# EAGLE board DB (EAGLE 9.6.1)
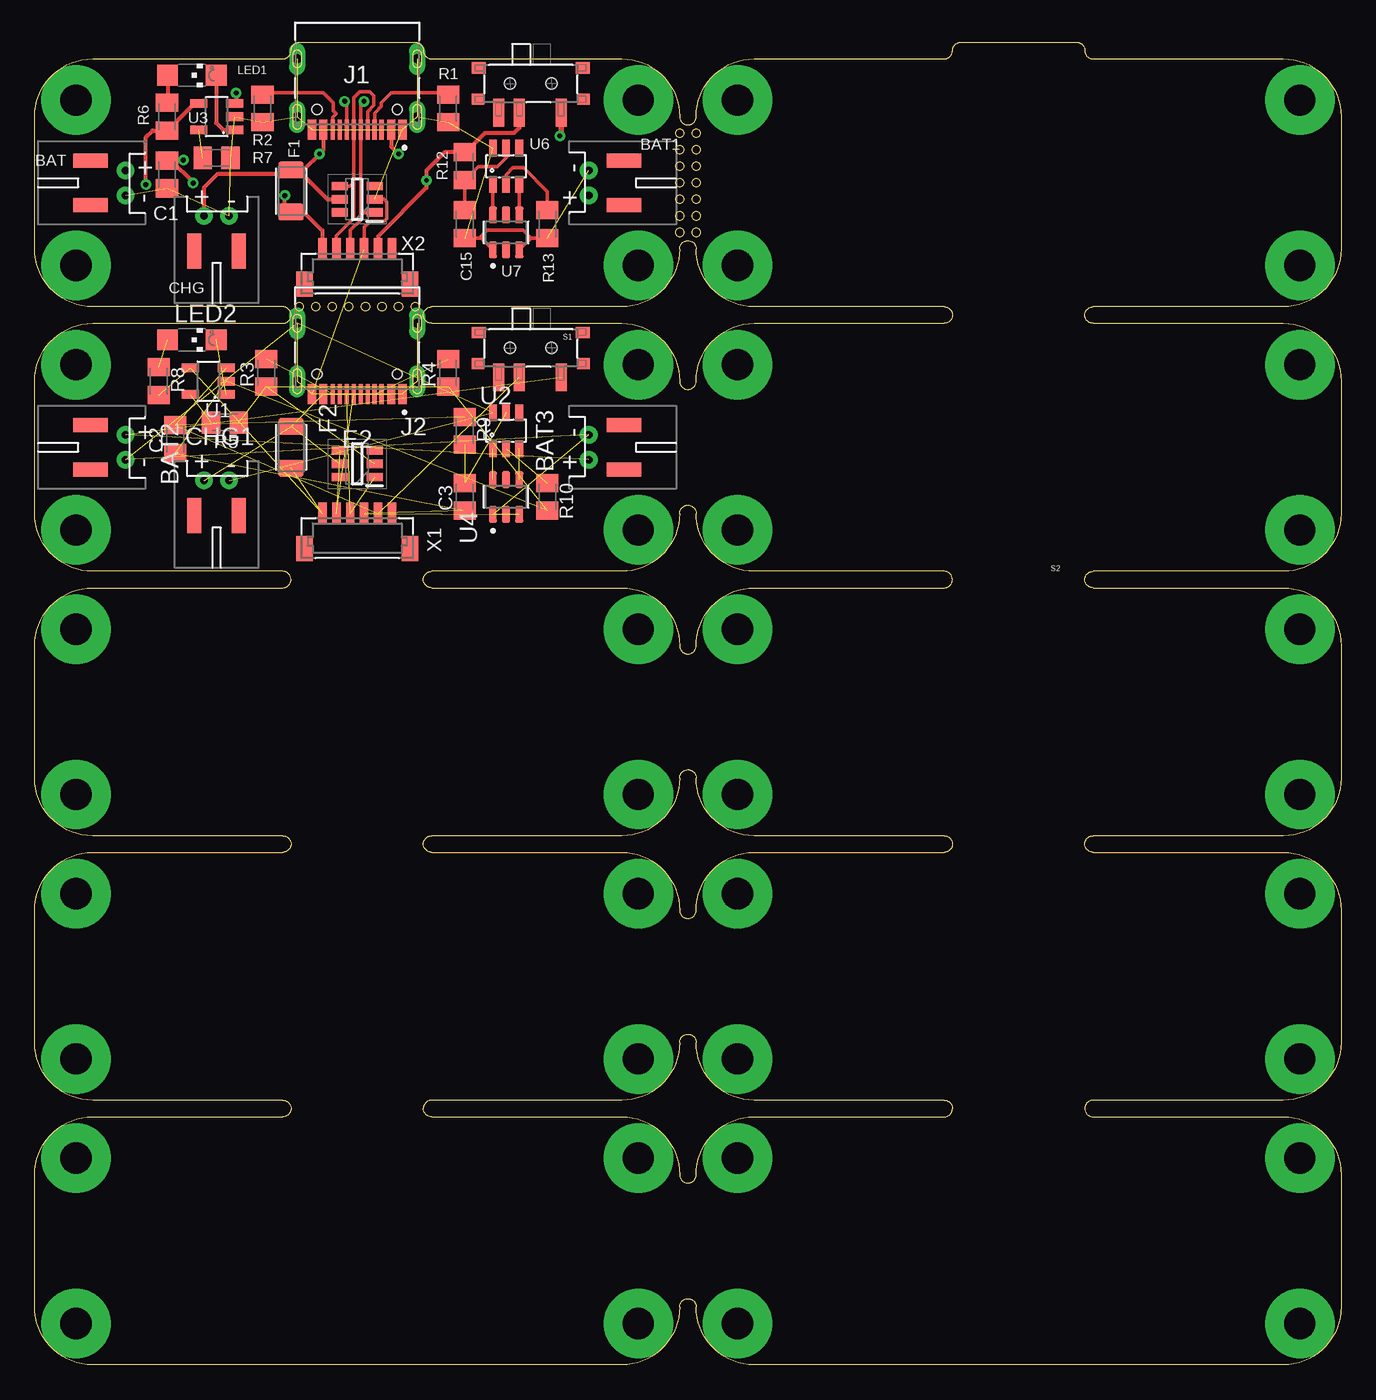
[diagram p0: board, top side]
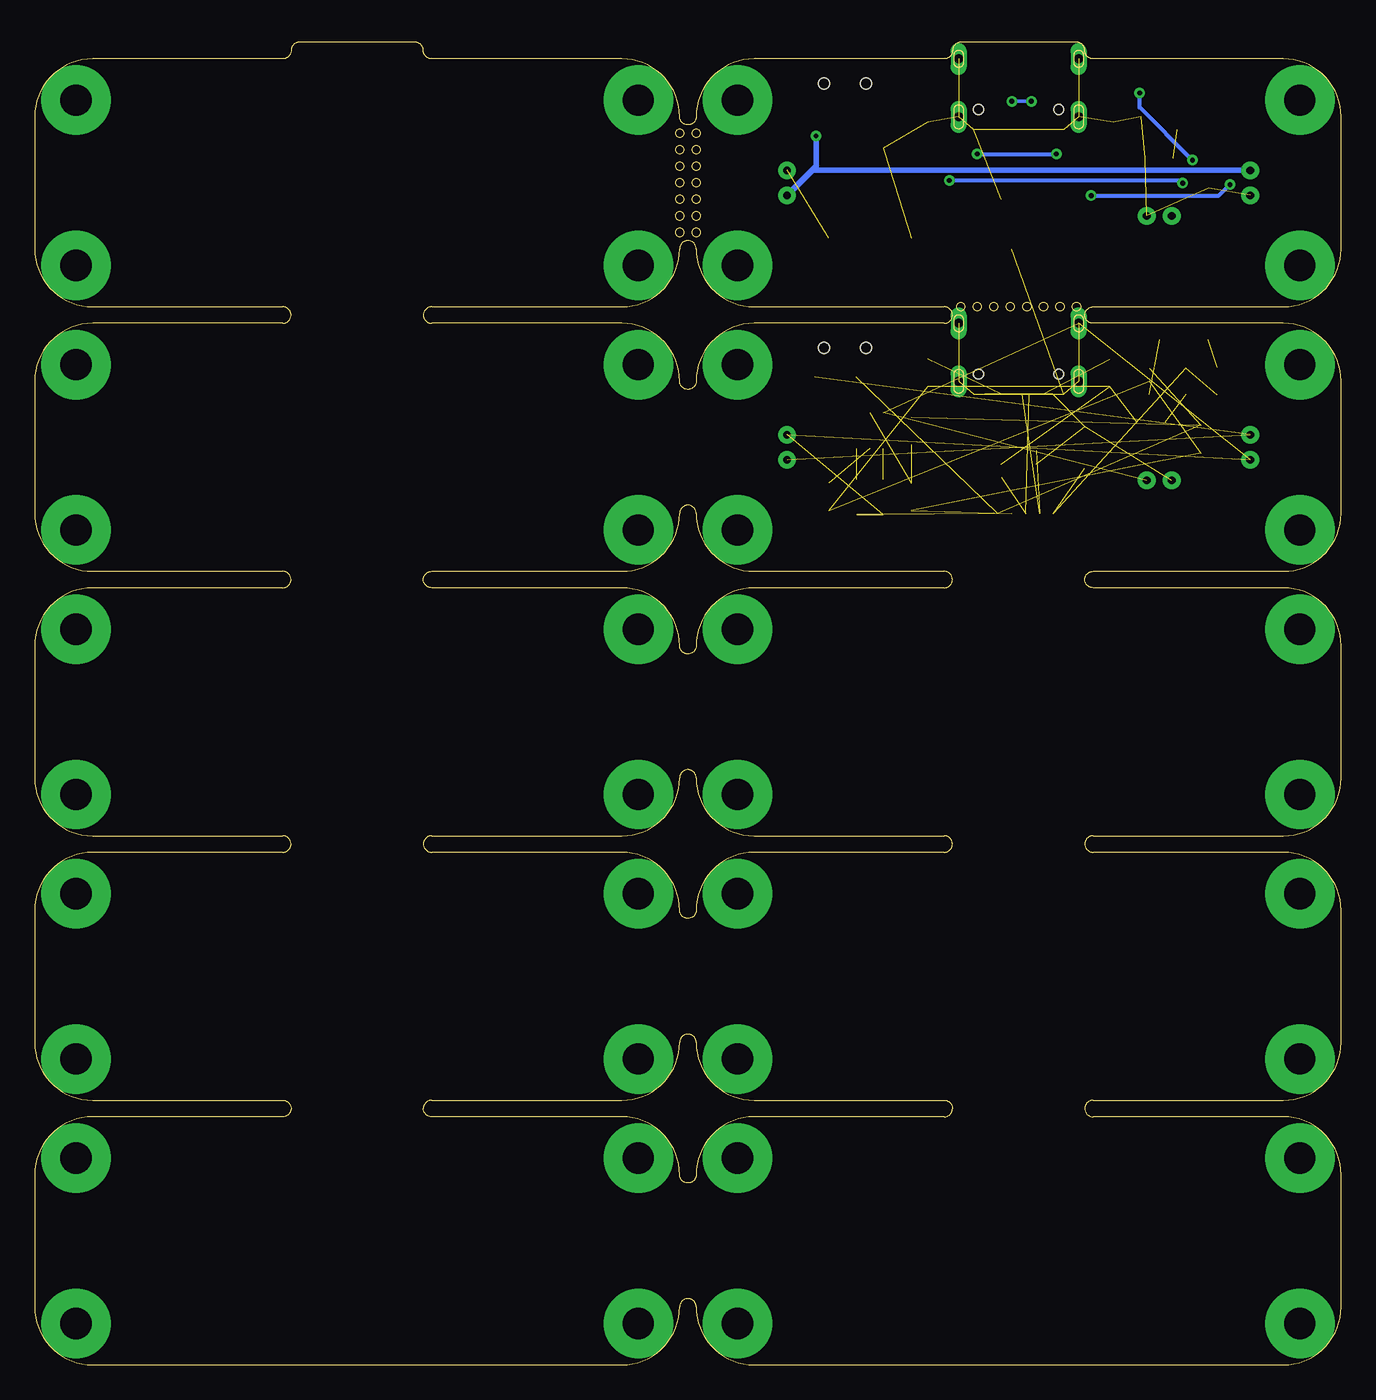
[diagram p1: board, bottom side, seen from below]

Size 94.06 x 95.25 mm. Coordinates in mm from the lower left corner, seen from the top.
Outline: 0,80.37 0,89.89 arc-90 4.17,94.06 17.86,94.06 arc90 18.45,94.65 arc-90 19.05,95.25 27.38,95.25 arc-90 27.98,94.65 arc90 28.57,94.06 42.27,94.06 arc-90 46.43,89.89 arc90 47.03,89.3 arc90 47.62,89.89 arc-90 51.79,94.06 65.48,94.06 arc90 66.08,94.65 arc-90 66.67,95.25 75.01,95.25 arc-90 75.6,94.65 arc90 76.2,94.06 89.89,94.06 arc-90 94.06,89.89 94.06,80.37 arc-90 89.89,76.2 76.2,76.2 arc90 75.6,75.6 arc90 76.2,75.01 89.89,75.01 arc-90 94.06,70.84 94.06,61.32 arc-90 89.89,57.15 76.2,57.15 arc90 75.6,56.55 arc90 76.2,55.96 89.89,55.96 arc-90 94.06,51.79 94.06,42.27 arc-90 89.89,38.1 76.2,38.1 arc90 75.6,37.5 arc90 76.2,36.91 89.89,36.91 arc-90 94.06,32.74 94.06,23.22 arc-90 89.89,19.05 76.2,19.05 arc90 75.6,18.45 arc90 76.2,17.86 89.89,17.86 arc-90 94.06,13.69 94.06,4.17 arc-90 89.89,0 51.79,0 arc-90 47.62,4.17 arc90 47.03,4.76 arc90 46.43,4.17 arc-90 42.27,0 4.17,0 arc-90 0,4.17 0,13.69 arc-90 4.17,17.86 17.86,17.86 arc90 18.45,18.45 arc90 17.86,19.05 4.17,19.05 arc-90 0,23.22 0,32.74 arc-90 4.17,36.91 17.86,36.91 arc90 18.45,37.5 arc90 17.86,38.1 4.17,38.1 arc-90 0,42.27 0,51.79 arc-90 4.17,55.96 17.86,55.96 arc90 18.45,56.55 arc90 17.86,57.15 4.17,57.15 arc-90 0,61.32 0,70.84 arc-90 4.17,75.01 17.86,75.01 arc90 18.45,75.6 arc90 17.86,76.2 4.17,76.2 arc-90 0,80.37
Outline: 46.43,80.37 arc-90 42.27,76.2 28.57,76.2 arc90 27.98,75.6 arc90 28.57,75.01 42.27,75.01 arc-90 46.43,70.84 arc90 47.03,70.25 arc90 47.62,70.84 arc-90 51.79,75.01 65.48,75.01 arc90 66.08,75.6 arc90 65.48,76.2 51.79,76.2 arc-90 47.62,80.37 arc90 47.03,80.96 arc90 46.43,80.37
Outline: 65.48,57.15 51.79,57.15 arc-90 47.62,61.32 arc90 47.03,61.91 arc90 46.43,61.32 arc-90 42.27,57.15 28.57,57.15 arc90 27.98,56.55 arc90 28.57,55.96 42.27,55.96 arc-90 46.43,51.79 arc90 47.03,51.2 arc90 47.62,51.79 arc-90 51.79,55.96 65.48,55.96 arc90 66.08,56.55 arc90 65.48,57.15
Outline: 46.43,42.27 arc-90 42.27,38.1 28.57,38.1 arc90 27.98,37.5 arc90 28.57,36.91 42.27,36.91 arc-90 46.43,32.74 arc90 47.03,32.15 arc90 47.62,32.74 arc-90 51.79,36.91 65.48,36.91 arc90 66.08,37.5 arc90 65.48,38.1 51.79,38.1 arc-90 47.62,42.27 arc90 47.03,42.86 arc90 46.43,42.27
Outline: 65.48,19.05 51.79,19.05 arc-90 47.62,23.22 arc90 47.03,23.81 arc90 46.43,23.22 arc-90 42.27,19.05 28.57,19.05 arc90 27.98,18.45 arc90 28.57,17.86 42.27,17.86 arc-90 46.43,13.69 arc90 47.03,13.1 arc90 47.62,13.69 arc-90 51.79,17.86 65.48,17.86 arc90 66.08,18.45 arc90 65.48,19.05
Outline: circle at 19.05,76.2 radius 0.3
Outline: circle at 20.24,76.2 radius 0.3
Outline: circle at 21.43,76.2 radius 0.3
Outline: circle at 22.62,76.2 radius 0.3
Outline: circle at 23.81,76.2 radius 0.3
Outline: circle at 25,76.2 radius 0.3
Outline: circle at 26.19,76.2 radius 0.3
Outline: circle at 27.38,76.2 radius 0.3
Outline: circle at 46.43,88.7 radius 0.3
Outline: circle at 46.43,87.51 radius 0.3
Outline: circle at 46.43,86.32 radius 0.3
Outline: circle at 46.43,85.13 radius 0.3
Outline: circle at 46.43,83.94 radius 0.3
Outline: circle at 46.43,82.75 radius 0.3
Outline: circle at 46.43,81.56 radius 0.3
Outline: circle at 47.62,81.56 radius 0.3
Outline: circle at 47.62,82.75 radius 0.3
Outline: circle at 47.62,83.94 radius 0.3
Outline: circle at 47.62,85.13 radius 0.3
Outline: circle at 47.62,86.32 radius 0.3
Copper layers (1*16): Top 0.035mm / dielectric 1.5mm / Bottom 0.035mm
Design rules "default *": minimum track width 6mil, minimum drill 0.35mm, track to track 7mil, track to pad 7mil, pad to pad 7mil, via to via 6mil, smd to smd 6mil, copper to edge 27mil, drill to drill 6mil, minimum pad ring 10mil, minimum via ring 8mil, stop-mask expansion 4mil, vias tented up to drill 14mil, thermal gap 10mil

## Footprints (pad centres in the part's own frame; a part is rotated, then mirrored left to right if it is on the bottom)
JST-PH-2-THM-RA = drill 0.55 pad 1.27: 1 0.9,0; 2 -0.9,0 | smd 1 x 2.5: P$1 -1.6,2.54; P$2 1.6,2.54
C0805 = smd 1.3 x 1.6: 1 -1,0; 2 1,0
SOT95P280X145-6N = smd 1.15 x 0.6: 1 -1.25,0.95; 2 -1.25,0; 3 -1.25,-0.95; 4 1.25,-0.95; 5 1.25,0; 6 1.25,0.95
RESC3216X125N = smd 1.2 x 1.82: 1 -1.505,0; 2 1.505,0
HRO_TYPE-C-31-M-12 = smd 0.6 x 1.45: A1B12 -3.25,5.095; A4B9 -2.45,5.095; B1A12 3.25,5.095; B4A9 2.45,5.095 | smd 0.3 x 1.45: A5 -1.25,5.095; A6 -0.25,5.095; A7 0.25,5.095; A8 1.25,5.095; B5 1.75,5.095; B6 0.75,5.095; B7 -0.75,5.095; B8 -1.75,5.095 | drill 0.65 pad 1.05 long: S1 -4.32,4.18; S2 4.32,4.18; S3 -4.32,0; S4 4.32,0 | hole 0.7: -2.89,3.65; 2.89,3.65
CHIPLED_1206 = smd 1.5 x 1.5: A 0,-1.75; C 0,1.75
R0805 = smd 1.3 x 1.6: 1 -1,0; 2 1,0
MSK-12C02 = smd 0.8 x 2: COM 0.823,2.1; L1 2.323,2.1; L2 -2.177,2.1 | smd 1 x 0.8: GND@1 -3.75,-1.125; GND@4 3.75,-1.125 | smd 0.9 x 0.8: GND@2 -3.8,1.125; GND@3 3.8,1.125 | hole 0.8: -1.5,0; 1.5,0
LTC4054 = smd 0.62 x 1.22: 1 -0.95,-1.3; 2 0,-1.3; 3 0.95,-1.3; 4 0.95,1.3; 5 -0.95,1.3
SOT23-6 = smd 0.55 x 1.2: 1 -0.95,-1.3; 2 0,-1.3; 3 0.95,-1.3; 4 0.95,1.3; 5 0,1.3; 6 -0.95,1.3
SOT95P280X145-6N' = smd 1.21 x 0.59: 1 -1.255,0.95; 2 -1.255,0; 3 -1.255,-0.95; 4 1.255,-0.95; 5 1.255,0; 6 1.255,0.95
BM06B-SRSS-TB = smd 0.6 x 1.55: 1 2.5,0; 2 1.5,0; 3 0.5,0; 4 -0.5,0; 5 -1.5,0; 6 -2.5,0 | smd 1.2 x 1.8: M1 3.8,-2.525; M2 -3.8,-2.525

## Placement (x,y rotation side)
BAT  [JST-PH-2-THM-RA]  6.55,85.13 90 top
BAT1  [JST-PH-2-THM-RA]  39.89,85.13 270 top
BAT2  [JST-PH-2-THM-RA]  6.55,66.08 90 top
BAT3  [JST-PH-2-THM-RA]  39.89,66.08 270 top
C1  4.7uf  [C0805]  9.53,85.72 90 top
C2  4.7uf  [C0805]  10.12,66.67 90 top
C3  100nF  [C0805]  30.96,62.51 90 top
C15  100nF  [C0805]  30.96,82.15 90 top
CHG  [JST-PH-2-THM-RA]  13.1,82.75 180 top
CHG1  [JST-PH-2-THM-RA]  13.1,63.7 180 top
E1  SRV05-4.TCT  [SOT95P280X145-6N]  23.22,83.94 180 top
E2  SRV05-4.TCT  [SOT95P280X145-6N]  23.22,64.89 180 top
F1  500mA  [RESC3216X125N]  18.45,84.53 270 top
F2  500mA  [RESC3216X125N]  18.45,66.08 270 top
J1  TYPE-C-31-M-12  [HRO_TYPE-C-31-M-12]  23.22,94.06 180 top
J2  TYPE-C-31-M-12  [HRO_TYPE-C-31-M-12]  23.22,75.01 180 top
LED1  [CHIPLED_1206]  11.31,92.87 270 top
LED2  [CHIPLED_1206]  11.31,73.82 270 top
R1  5.1k  [R0805]  29.77,90.49 90 top
R2  5.1k  [R0805]  16.4,90.49 90 top
R3  5.1k  [R0805]  16.67,71.44 90 top
R4  5.1k  [R0805]  29.77,71.44 90 top
R5  10k/2k  [R0805]  13.69,67.87 180 top
R6  1k  [R0805]  9.53,89.89 270 top
R7  10k/2k  [R0805]  13.1,86.92 180 top
R8  1k  [R0805]  8.93,70.84 270 top
R9  100ohm  [R0805]  30.96,67.27 270 top
R10  [R0805]  36.91,62.51 270 top
R12  100ohm  [R0805]  30.96,86.32 270 top
R13  [R0805]  36.91,82.15 270 top
S1  MSK-12C02_SMD_SPDT_SWITCH  [MSK-12C02]  35.72,73.22 180 top
S2  MSK-12C02_SMD_SPDT_SWITCH  [MSK-12C02]  35.72,92.27 180 top
U1  LTC4054  [LTC4054]  12.5,70.84 90 top
U2  DW01A  [SOT23-6]  33.93,67.27 0 top
U3  LTC4054  [LTC4054]  13.1,89.89 90 top
U4  FS8205  [SOT95P280X145-6N']  33.93,62.51 90 top
U6  DW01A  [SOT23-6]  33.93,86.32 0 top
U7  FS8205  [SOT95P280X145-6N']  33.93,81.56 90 top
X1  BM06B-SRSS-TB  [BM06B-SRSS-TB]  23.22,61.32 0 top
X2  BM06B-SRSS-TB  [BM06B-SRSS-TB]  23.22,80.37 0 top

## Library data of the parts
BAT BAT1-BAT3 CHG CHG1 LED1 LED2 = adafruit
C1-C3 C15 R1-R10 R12 R13 = Components
E1 E2 = SRV05-4.TCT; AVAILABILITY: In Stock; DESCRIPTION: 17.5V Clamp 12A (8/20µs) Ipp Tvs Diode Surface Mount SOT-23-6; MF: Semtech; MP: SRV05-4.TC; PACKAGE: SOT-23-6 Semtech; PRICE: None; PURCHASE-URL: https://pricing.snapeda.com/search/part/SRV05-4.TC/?ref=eda
F1 F2 = fuse; AVAILABILITY: In Stock; DESCRIPTION: 1206 SMT PPTC | 0.75 Ih | 16V; MF: Bel Fuse; MP: 0ZCJ0075AF2E; PACKAGE: 1206 Bel Fuse; PRICE: None; PURCHASE-URL: https://pricing.snapeda.com/search/part/0ZCJ0075AF2E/?ref=eda
J1 J2 = TYPE-C-31-M-12; AVAILABILITY: Unavailable; DESCRIPTION: USB Connectors 24 Receptacle 1 8.94*7.3mm RoHS; MF: HRO Electronics Co., Ltd.; MP: TYPE-C-31-M-12; PACKAGE: Package; PRICE: None
S1 S2 = MSK-12C02 SMD Micro Slider Switch SPDT
U1 U3 = LTC4054
U2 U6 = DW01A; AVAILABILITY: Not in stock; DESCRIPTION: One Cell Lithium-ion/Polymer Battery Protection IC; MF: Fortune Semiconductor; MP: DW01A; PACKAGE: SOT-23-6 Fortune Semiconductor; PRICE: None
U4 U7 = FS8205; AVAILABILITY: Not in stock; DESCRIPTION: Dual N-Channel Enhancement Mode Power MOSFET; MF: Fortune Semiconductor; MP: FS8205; PACKAGE: Package; PRICE: None
X1 X2 = con-JST SH

## Nets
DN: E1.4 J1.A7 J1.B7 X2.5
DN1: E2.4 J2.A7 J2.B7 X1.5
DP: E1.1 J1.A6 J1.B6 X2.4
DP1: E2.1 J2.A6 J2.B6 X1.4
GND: BAT1.2 BAT2.2 BAT3.2 BAT.2 C1.1 C2.1 C3.1 C15.1 CHG1.2 CHG.2 E1.2 E2.2 J1.A1B12 J1.B1A12 J1.S1 J1.S2 J1.S3 J1.S4 J2.A1B12 J2.B1A12 J2.S1 J2.S2 J2.S3 J2.S4 R1.1 R2.1 R3.1 R4.1 R5.1 R7.1 R10.2 R13.2 U1.2 U2.6 U3.2 U4.1 U4.3 U6.6 U7.1 U7.3 X1.3 X2.3
N$41: J2.A5 R4.2
N$42: J2.B5 R3.2
N$43: R5.2 U1.5
N$44: LED2.C U1.1
N$45: LED2.A R8.1
N$46: BAT2.1 BAT3.1 S1.L2
N$47: C3.2 R9.2 U2.5
N$48: R10.1 U2.2
N$49: U2.1 U4.6
N$50: U2.3 U4.4
N$82: BAT1.1 BAT.1 S2.L2
N$83: J1.A5 R1.2
N$85: J1.B5 R2.2
N$87: R7.2 U3.5
N$88: LED1.C U3.1
N$89: LED1.A R6.1
N$110: C15.2 R12.2 U6.5
N$111: R13.1 U6.2
N$112: U6.1 U7.6
N$113: U6.3 U7.4
VBAT: C1.2 R12.1 S2.COM U3.3 X2.2
VBAT1: C2.2 R9.1 S1.COM U1.3 X1.2
VCC: F1.2 R6.2 U3.4 X2.6
VCC1: F2.2 R8.2 U1.4 X1.6
VUSB: CHG.1 E1.5 F1.1 J1.A4B9 J1.B4A9
VUSB1: CHG1.1 E2.5 F2.1 J2.A4B9 J2.B4A9

## Tracks (layer width: path | path; a pad name or v marks a point on that pad's centre or on a via)
DN
  Top 0.254: 22.97,85.17 J1.A7 22.97,91.27 23.4,91.7 24.1,91.7 24.4,91.4 24.4,90.7 23.97,90.27 J1.B7 | E1.4 22.69,84.89 22.97,85.17 | 22.97,85.17 22.97,82.57 21.72,81.32 X2.5
DN1  (3 unrouted)
DP  (via drill 0.35)
  Top 0.254: 23.47,83.24 J1.A6 23.47,90.77 v23.7,91 | E1.1 23.72,82.99 23.47,83.24 | J1.B6 22.47,90.85 v22.31,91 | 23.47,83.24 23.47,82.46 22.72,81.71 X2.4
  Bottom 0.254: v22.31,91 v23.7,91
DP1  (3 unrouted)
GND  (37 unrouted)
  Top 0.254: X2.3 23.72,81.92 24.18,82.38 25.17,82.38 25.35,82.56 25.35,83.76 25.17,83.94 E1.2 | U7.3 35.73,81.15 | 35.73,81.15 R13.2 | C15.1 32,81.15 | 32,81.15 32.13,81.15 U7.1 | 32,81.15 32.56,81.7 35.18,81.7 35.73,81.15
N$1  (via drill 2.25 pad 5)
  other vias: 2.98,91.08
N$2  (via drill 2.25 pad 5)
  other vias: 2.98,79.18
N$3  (via drill 2.25 pad 5)
  other vias: 43.46,79.18
N$4  (via drill 2.25 pad 5)
  other vias: 43.46,91.08
N$5  (via drill 2.25 pad 5)
  other vias: 50.6,91.08
N$6  (via drill 2.25 pad 5)
  other vias: 50.6,79.18
N$7  (via drill 2.25 pad 5)
  other vias: 91.08,79.18
N$8  (via drill 2.25 pad 5)
  other vias: 91.08,91.08
N$9  (via drill 2.25 pad 5)
  other vias: 2.98,72.03
N$10  (via drill 2.25 pad 5)
  other vias: 2.98,60.13
N$11  (via drill 2.25 pad 5)
  other vias: 43.46,60.13
N$12  (via drill 2.25 pad 5)
  other vias: 43.46,72.03
N$13  (via drill 2.25 pad 5)
  other vias: 50.6,72.03
N$14  (via drill 2.25 pad 5)
  other vias: 50.6,60.13
N$15  (via drill 2.25 pad 5)
  other vias: 91.08,60.13
N$16  (via drill 2.25 pad 5)
  other vias: 91.08,72.03
N$17  (via drill 2.25 pad 5)
  other vias: 2.98,52.98
N$18  (via drill 2.25 pad 5)
  other vias: 2.98,41.08
N$19  (via drill 2.25 pad 5)
  other vias: 43.46,41.08
N$20  (via drill 2.25 pad 5)
  other vias: 43.46,52.98
N$21  (via drill 2.25 pad 5)
  other vias: 50.6,52.98
N$22  (via drill 2.25 pad 5)
  other vias: 50.6,41.08
N$23  (via drill 2.25 pad 5)
  other vias: 91.08,41.08
N$24  (via drill 2.25 pad 5)
  other vias: 91.08,52.98
N$25  (via drill 2.25 pad 5)
  other vias: 2.98,33.93
N$26  (via drill 2.25 pad 5)
  other vias: 2.98,22.03
N$27  (via drill 2.25 pad 5)
  other vias: 43.46,22.03
N$28  (via drill 2.25 pad 5)
  other vias: 43.46,33.93
N$29  (via drill 2.25 pad 5)
  other vias: 50.6,33.93
N$30  (via drill 2.25 pad 5)
  other vias: 50.6,22.03
N$31  (via drill 2.25 pad 5)
  other vias: 91.08,22.03
N$32  (via drill 2.25 pad 5)
  other vias: 91.08,33.93
N$33  (via drill 2.25 pad 5)
  other vias: 2.98,14.88
N$34  (via drill 2.25 pad 5)
  other vias: 2.98,2.98
N$35  (via drill 2.25 pad 5)
  other vias: 43.46,2.98
N$36  (via drill 2.25 pad 5)
  other vias: 43.46,14.88
N$37  (via drill 2.25 pad 5)
  other vias: 50.6,14.88
N$38  (via drill 2.25 pad 5)
  other vias: 50.6,2.98
N$39  (via drill 2.25 pad 5)
  other vias: 91.08,2.98
N$40  (via drill 2.25 pad 5)
  other vias: 91.08,14.88
N$41  (1 unrouted)
N$42  (1 unrouted)
N$43  (1 unrouted)
N$44  (1 unrouted)
N$45  (1 unrouted)
N$46  (2 unrouted)
N$47  (2 unrouted)
N$48  (1 unrouted)
N$49  (1 unrouted)
N$50  (1 unrouted)
N$82  (via drill 0.35)
  Top 0.406: v37.8,88.5 37.9,88.6 S2.L2
  Bottom 0.406: BAT.1 38.09,86.03 | 38.09,86.03 BAT1.1 | 38.09,86.03 37.8,86.31 v37.8,88.5
N$83
  Top 0.254: J1.A5 24.47,90.16 24.94,90.63 24.94,90.89 25.66,91.6 29.65,91.6 R1.2
N$85
  Top 0.254: J1.B5 21.47,89.87 21.7,90.1 21.49,90.32 21.49,90.89 20.78,91.6 16.52,91.6 R2.2
N$87  (1 unrouted)
N$88
  Top 0.305: LED1.C 13.06,89.45 13.57,88.94 U3.1
N$89
  Top 0.305: LED1.A 9.56,90.93 R6.1
N$110
  Top 0.254: U6.5 33.93,86.93 33.3,86.3 31.94,86.3 R12.2 C15.2
N$111
  Top 0.254: U6.2 33.93,85.73 34.4,86.2 35.2,86.2 36.91,84.5 R13.1
N$112
  Top 0.254: U6.1 U7.6
N$113
  Top 0.254: U6.3 U7.4
VBAT  (via drill 0.35)
  Top 0.305: S2.COM 34.9,89.1 34.5,88.7 32.4,88.7 31.02,87.32 R12.1 29.52,87.32 28.2,86 v28.2,85.3 28.2,84.77 24.72,81.29 X2.2 | v11.4,85.1 11.4,85.16 9.84,86.72 C1.2 9.56,86.76 v10.7,86.76 | v14.5,91.6 14.5,90.95 U3.3
  Bottom 0.305: v28.2,85.3 11.6,85.3 v11.4,85.1 | v10.7,86.76 14.5,90.56 v14.5,91.6
VBAT1  (4 unrouted)
VCC  (via drill 0.35)
  Top 0.305: X2.6 20.72,81.69 19.38,83.03 F1.2 18,83.48 v18,84.2 | v8,85 8,88.4 8.49,88.89 R6.2 11.47,90.84 U3.4
  Bottom 0.305: v18,84.2 8.8,84.2 v8,85
VCC1  (3 unrouted)
VUSB  (via drill 0.35)
  Top 0.305: J1.B4A9 20.77,87.47 v20.5,87.2 19.34,86.04 F1.1 | J1.A4B9 25.67,87.74 v26.2,87.2 | F1.1 18.97,86.04 21.07,83.94 E1.5 | CHG.1 12.2,84.8 13.19,85.79 18.2,85.79 F1.1
  Bottom 0.305: v26.2,87.2 v20.5,87.2
VUSB1  (4 unrouted)